# Altium PCB PCB1.PcbDoc
Units mm, origin at the board's own origin, x right, y up, seen from the top; angles counter-clockwise.
Board outline 152.4 x 101.6 mm, 2 copper layers (Top Layer, Bottom Layer); 44 components, 66 nets, 244 pads, 0 vias.
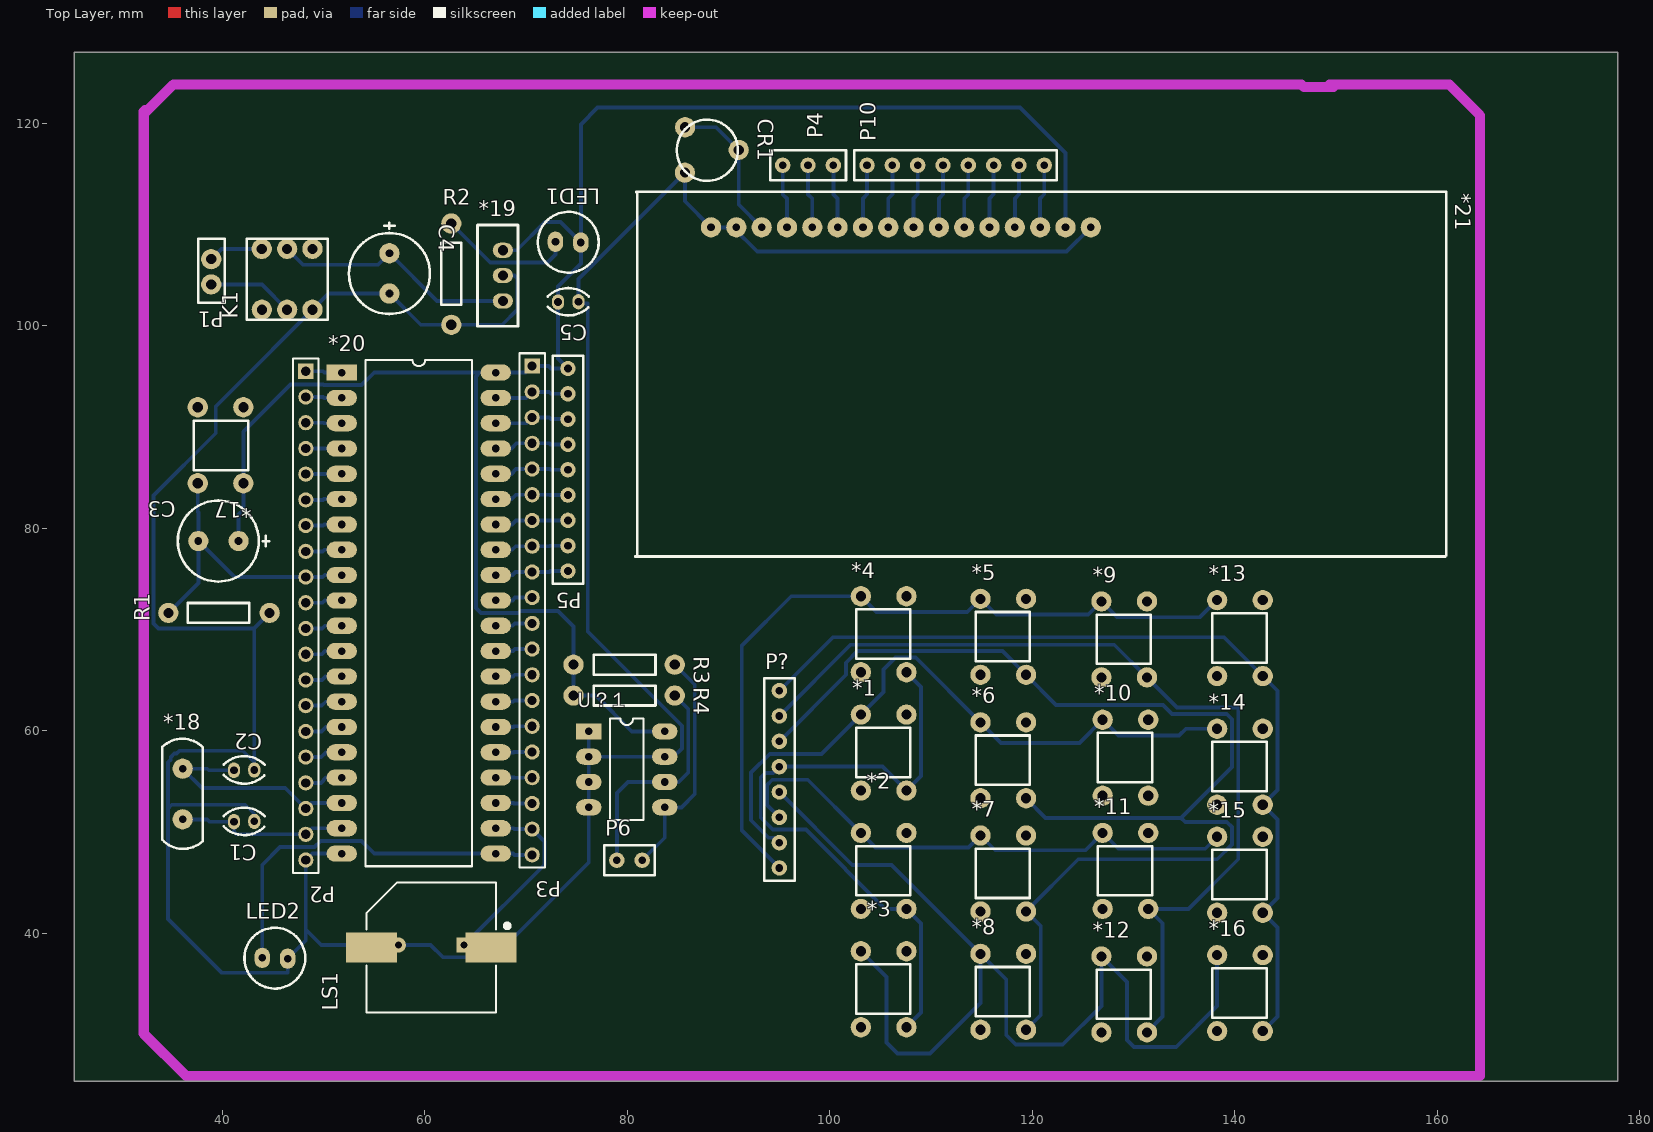
[diagram p0: Top Layer view]
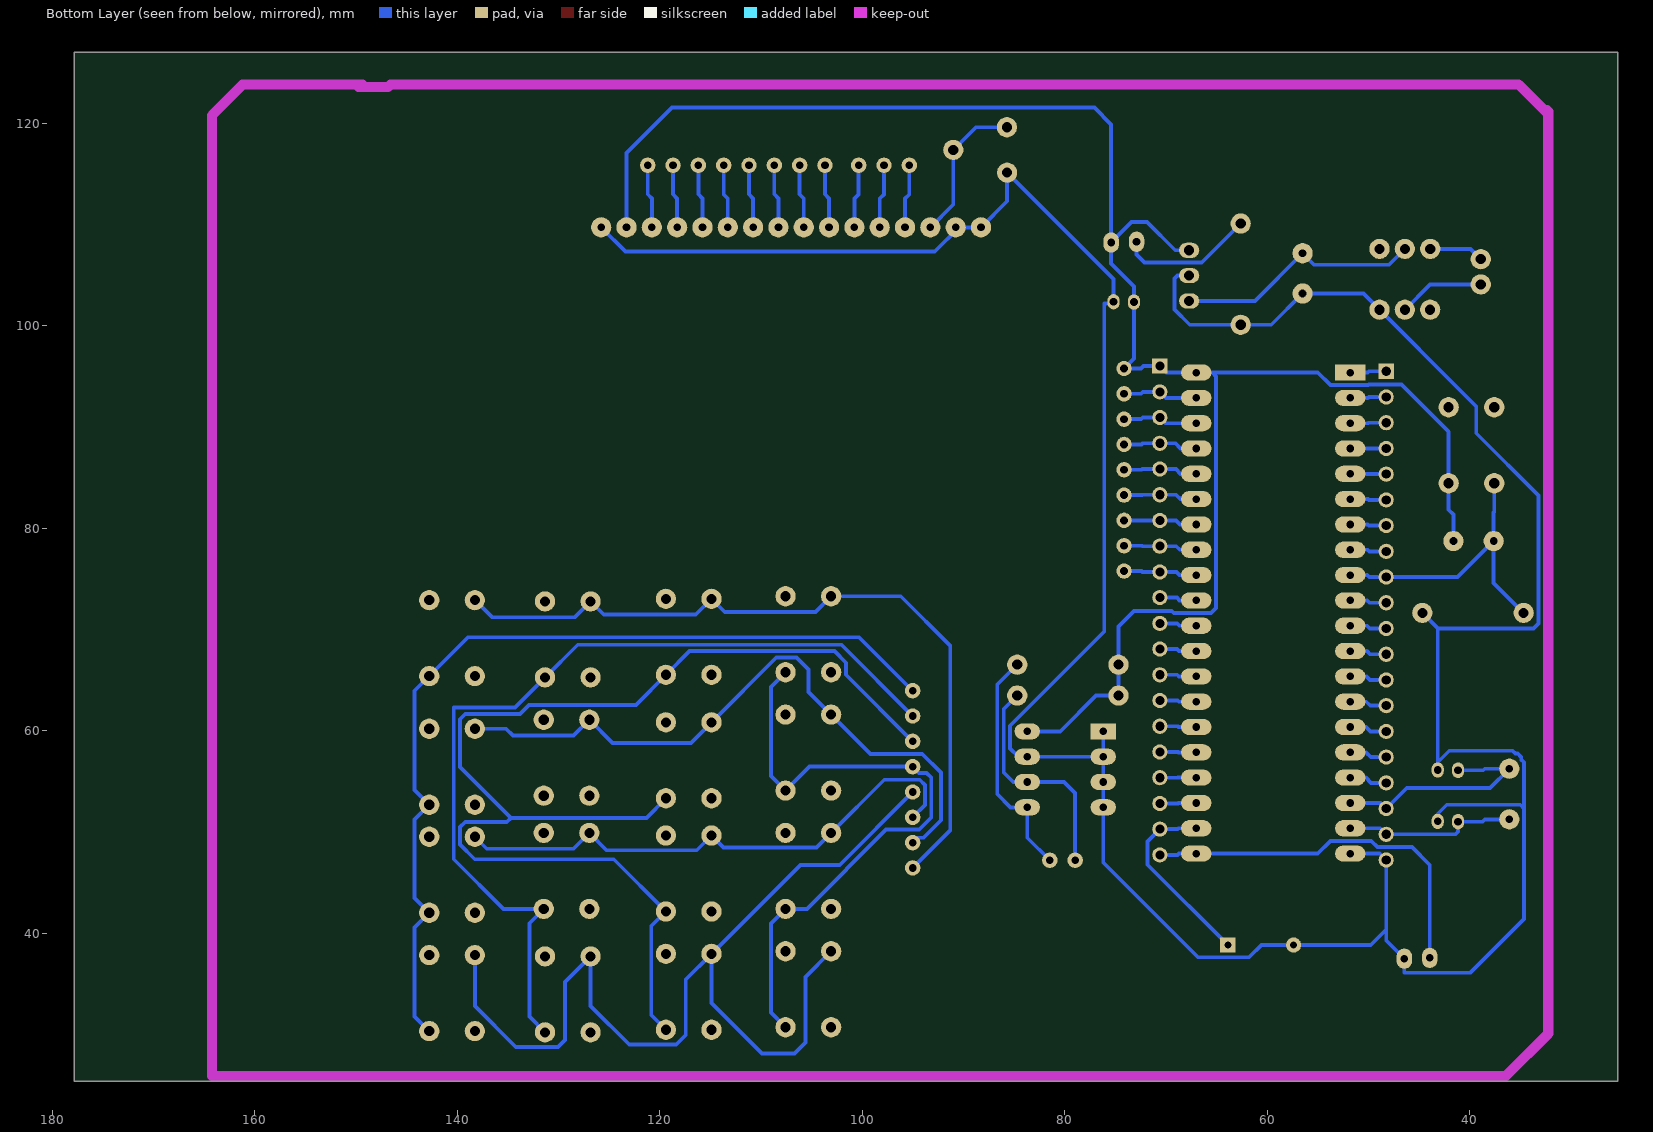
[diagram p1: Bottom Layer view, seen from below]

## Layer stack, top to bottom
Top Layer: signal copper 0.0356
Dielectric: dielectric 0.32, FR-4, Dk 4.8
Bottom Layer: signal copper 0.0356

## Board outline
25.4,25.4 177.8,25.4 177.8,127 25.4,127

## Design rules (kind name [scope] priority, off if disabled: settings)
Clearance [All] p1: gap=0.254
ComponentClearance [All] p1: gap=0.254 collisioncheckmode=3 verticalgap=0.254
PolygonConnect [All] p1: connectstyle=Relief reliefconductorwidth=0.254 reliefentries=4 polygonreliefangle="90 Angle"
RoutingLayers [All] p1: top layer_v5=FALSE bottom layer_v5=TRUE
RoutingVias [All] p1: holewidth=0.711 width=1.27 viastyle="Through Hole" minholewidth=0.711 minwidth=1.27 maxholewidth=0.711 maxwidth=1.27
SolderMaskExpansion [All] p1: expansion=0.102
TestPointUsage [All] p1: valid=0 allowmultiple=FALSE
Testpoint [All] p1: side=15 testpointundercomponent=TRUE minsize=1.016 maxsize=2.54 preferedsize=1.524 minholesize=0 maxholesize=1.016 preferedholesize=0.813 testpointgrid=0.025 style=1023 order=0-112345678
Width [All] p1: maxlimit=0.5 minlimit=0.254 preferedwidth=0.38
17 further rules are at their usual default settings.

## Components (designator, comment, footprint, x,y, rotation, side; value= is the part's Value field where it differs from the comment)
*1 "按键键盘" 按键键盘 107.569,54.102 r90 top
*2 "按键键盘" 按键键盘 107.569,42.418 r90 top
*3 "按键键盘" 按键键盘 107.569,30.734 r90 top
*4 "按键键盘" 按键键盘 107.569,65.786 r90 top
*5 "按键键盘" 按键键盘 119.38,65.532 r90 top
*6 "按键键盘" 按键键盘 119.38,53.34 r90 top
*7 "按键键盘" 按键键盘 119.38,42.164 r90 top
*8 "按键键盘" 按键键盘 119.38,30.48 r90 top
*9 "按键键盘" 按键键盘 131.318,65.278 r90 top
*10 "按键键盘" 按键键盘 131.445,53.594 r90 top
*11 "按键键盘" 按键键盘 131.445,42.418 r90 top
*12 "按键键盘" 按键键盘 131.318,30.226 r90 top
*13 "按键键盘" 按键键盘 142.748,65.405 r90 top
*14 "按键键盘" 按键键盘 142.748,52.705 r90 top
*15 "按键键盘" 按键键盘 142.748,42.037 r90 top
*16 "按键键盘" 按键键盘 142.748,30.353 r90 top
*17 "按键键盘" 按键键盘 37.592,91.948 r270 top
*18 "Y1" 晶振 38.1,48.26 r90 top
*19 "LM7805" L7xxxCV 69.215,99.949 r90 top
*20 "MCU-40P" MCU-DIP40 51.816,95.377 r0 top
*21 "LCD1602" LCD1602 80.772,77.216 r0 top
C1 "瓷片电容" 瓷片电容 42.164,51.308 r180 top
C2 "瓷片电容" 瓷片电容 42.164,56.388 r180 top
C3 "电解电容" C8mm 39.624,78.74 r180 top
C4 "电解电容" C8mm 56.515,105.156 r270 top
C5 "瓷片电容" 瓷片电容 74.168,102.616 r180 top
CR1 "可调电阻" 可调电阻 87.884,117.348 r270 top
K1 "自锁开关" 自锁开关 50.419,100.584 r90 top
LED1 "LED" LED 74.168,108.204 r180 top
LED2 "LED" LED 45.212,37.592 r0 top
LS1 "Buzzer" ABSM-1574 66.548,38.608 r180 top
P1 "hd2" 排针x2 37.719,108.077 r270 top
P2 "Header 20" HDR1X20 48.26,95.504 r270 top
P3 "Header 20" HDR1X20 70.612,96.012 r270 top
P4 "Header 3" HD3X1 101.6,117.348 r180 top
P5 "Header 9" HD9X1 72.644,97.028 r270 top
P6 "Header 2" HD2X1 77.724,45.72 r0 top
P10 "Header 8" HD8X1 122.428,117.348 r180 top
P? "Header 8" HD8X1 96.52,45.212 r90 top
R1 "RES" res 43.688,72.644 r180 top
R2 "RES" res 63.627,101.092 r90 top
R3 "RES" res 75.692,65.532 r0 top
R4 "RES" res 75.692,62.484 r0 top
U？1 "at24c02" DIP8 76.2,59.944 r0 top

## Footprints (in the part's own frame and the unit in brackets; to place one, negate y for a bottom-side part, rotate by r counter-clockwise, add the part's x,y. Pads: shape width x height; smd on the part's side, far side on the other; paste and mask are expansions set on the pad)
ABSM-1574 [mm] "Magnetic Transducer Buzzer"
  rect 5x3 smd: 1(0,0) 2(11.8,0)
  rect 1.5x1.5 hole 0.7: 1A(2.65,-0.24)
  round 1.5 hole 0.7: 2A(9.15,-0.24)
  silkscreen extent -1.83,-6.4 12.3,6.4
C8mm [mm]
  round 2 hole 0.762: 1(-2,0) 2(1.975,0)
  silkscreen extent -5,-4 4,4
DIP8 [mm]
  rect 2.5x1.6 hole 0.75: 1(0,0)
  oval 2.5x1.6 hole 0.75: 2(0,-2.5) 3(0,-5) 4(0,-7.5) 5(7.5,-7.5) 6(7.5,-5) 7(7.5,-2.5) 8(7.5,0)
  silkscreen extent 2.08,-8.75 5.42,1.25
HD2X1 [mil] "HD2"
  round 60 hole 30: 1(49.21,59.06) 2(147.64,59.06)
  silkscreen extent 0,0 197,118
HD3X1 [mil] "HD3X1"
  round 60 hole 30: 1(49.21,59.06) 2(147.64,59.06) 3(246.06,59.06)
  silkscreen extent 0,0 295,118
HD8X1 [mil] "HD8X1"
  round 60 hole 30: 1(49.21,59.06) 2(147.64,59.06) 3(246.06,59.06) 4(344.49,59.06) 5(442.91,59.06) 6(541.34,59.06) 7(639.76,59.06) 8(738.19,59.06)
  silkscreen extent 0,0 787,118
HD9X1 [mil] "HD9X1"
  round 60 hole 30: 1(49.21,59.06) 2(147.64,59.06) 3(246.06,59.06) 4(344.49,59.06) 5(442.91,59.06) 6(541.34,59.06) 7(639.76,59.06) 8(738.19,59.06) 9(836.61,59.06)
  silkscreen extent 0,0 886,118
HDR1X20 [mm] "Connector; Header; 20 Position"
  rect 1.5x1.5 hole 0.9: 1(0,0)
  round 1.5 hole 0.9: 2(2.54,0) 3(5.08,0) 4(7.62,0) 5(10.16,0) 6(12.7,0) 7(15.24,0) 8(17.78,0) 9(20.32,0) 10(22.86,0) 11(25.4,0) 12(27.94,0) 13(30.48,0) 14(33.02,0) 15(35.56,0) 16(38.1,0) 17(40.64,0) 18(43.18,0) 19(45.72,0) 20(48.26,0)
  silkscreen extent -1.27,-1.27 49.53,1.27
L7xxxCV [mm] "三端稳压管"
  oval 1.5x2 hole 1: 1(2.5,1.5) 2(5,1.5) 3(7.5,1.5)
  silkscreen extent 0,0 10,4
LCD1602 [mm] "L?"
  round 2 hole 0.762: 1(7.5,32.5) 2(10,32.5) 3(12.5,32.5) 4(15,32.5) 5(17.5,32.5) 6(20,32.5) 7(22.5,32.5) 8(25,32.5) 9(27.5,32.5) 10(30,32.5) 11(32.5,32.5) 12(35,32.5) 13(37.5,32.5) 14(40,32.5) 15(42.5,32.5) 16(45,32.5)
  silkscreen extent 0,0 80.1,36
LED [mm]
  oval 1.524x2 hole 0.762: 1(-1.25,-0.01) 2(1.26,-0.09)
  silkscreen extent -3.01,-3.04 2.99,2.96
MCU-DIP40 [mm]
  rect 3x1.6 hole 0.75: 1(0,0)
  oval 3x1.6 hole 0.75: 2(0,-2.5) 3(0,-5) 4(0,-7.5) 5(0,-10) 6(0,-12.5) 7(0,-15) 8(0,-17.5) 9(0,-20) 10(0,-22.5) 11(0,-25) 12(0,-27.5) 13(0,-30) 14(0,-32.5) 15(0,-35) 16(0,-37.5) 17(0,-40) 18(0,-42.5) 19(0,-45) 20(0,-47.5) 21(15.2,-47.5) 22(15.2,-45) 23(15.2,-42.5) 24(15.2,-40) 25(15.2,-37.5) 26(15.2,-35) 27(15.2,-32.5) 28(15.2,-30) 29(15.2,-27.5) 30(15.2,-25) 31(15.2,-22.5) 32(15.2,-20) 33(15.2,-17.5) 34(15.2,-15) 35(15.2,-12.5) 36(15.2,-10) 37(15.2,-7.5) 38(15.2,-5) 39(15.2,-2.5) 40(15.2,0)
  silkscreen extent 2.34,-48.75 12.86,1.25
res [mm]
  round 2 hole 1: 1(-1,1) 2(9,1)
  silkscreen extent 1,0.02 7.1,1.98
可调电阻 [mm]
  round 2 hole 1: 1(-2.25,-2.17) 2(-0.01,3.12) 3(2.23,-2.19)
  silkscreen extent -3,-3 3.04,3.04
按键键盘 [mm]
  round 2 hole 1: 1(0,4.5) 2(0,0) 3(7.5,0) 4(7.5,4.5)
  silkscreen extent 1.33,-0.38 6.2,4.97
排针x2 [mm]
  round 2 hole 1: 1(1.5,1.2) 2(4,1.2)
  silkscreen extent -0.5,-0.06 5.8,2.55
晶振 [mm]
  round 2 hole 0.762: 1(3,2) 2(8,2)
  silkscreen extent 0.09,0 10.96,4.02
瓷片电容 [mm]
  oval 1.2x1.5 hole 0.762: 1(-1.01,0.25)
  oval 1.2x1.524 hole 0.762: 2(1,0.28)
  silkscreen extent -2.03,-1.11 2.02,1.6
自锁开关 [mm]
  round 2 hole 1: 1(1,6.5) 2(1,4) 3(1,1.5) 4(7,1.5) 5(7,4) 6(7,6.51)
  silkscreen extent 0,0 8,8

## Part data
*2: library part Y1
*3 *19: library part L7xxxCV
*4: library part MCU-40P
LS1: "Magnetic Transducer Buzzer"
P2 P3: "Header, 20-Pin"
P4: library part "Header 9", "Header, 9-Pin"
P5: "Header, 9-Pin"
P6: "Header, 2-Pin"
P10 P?: "Header, 8-Pin"
U？1: library part DIP8

## Nets (pads, with @x,y where several pads share a name; then routed paths per layer and width w, separated by ;. In a path a pad name is that pad's centre, name@x,y a point inside that pad or via, vN(x,y) a via of type N, cw(c..) or ccw(c..) an arc to the next point about the centre after c; other vN are vias at no path point)
D0: *21.7 P10.8 | length 6.3
  Bottom Layer w0.38: *21.7 103.272,112.573 103.678,112.979 P10.8
D1: *21.8 P10.7 | length 6.3
  Bottom Layer w0.38: *21.8 105.772,112.573 106.178,112.979 P10.7
D2: *21.9 P10.6 | length 6.3
  Bottom Layer w0.38: *21.9 108.272,112.573 108.678,112.979 P10.6
D3: *21.10 P10.5 | length 6.3
  Bottom Layer w0.38: *21.10 110.772,112.573 111.178,112.979 P10.5
D4: *21.11 P10.4 | length 6.3
  Bottom Layer w0.38: *21.11 113.272,112.573 113.678,112.979 P10.4
D5: *21.12 P10.3 | length 6.3
  Bottom Layer w0.38: *21.12 115.772,112.573 116.178,112.979 P10.3
D6: *21.13 P10.2 | length 6.3
  Bottom Layer w0.38: *21.13 118.272,112.573 118.678,112.979 P10.2
D7: *21.14 P10.1 | length 6.3
  Bottom Layer w0.38: *21.14 120.772,112.573 121.178,112.979 P10.1
E: *21.6 P4.1 | length 6.3
  Bottom Layer w0.38: P4.1 100.35,112.969 100.772,112.547 *21.6
GND: *19.2 *20.20 *21.1 *21.2 *21.16 C1.1 C2.1 C4.2 C5.1 CR1.3 K1.3 LED2.2 LS1.2 LS1.2A P2.20 R1.1 R2.1 U？1.1 U？1.2 U？1.3 U？1.4 U？1.7 | length 323.2
  Bottom Layer w0.38: 34.646,52.324 35.027,52.705 42.285,52.705 43.174,51.816 C1.1 ; C2.1 43.174,70.13 ; 43.174,56.896 42.031,58.039 35.789,58.039 35.503,57.753 35.274,57.753 34.931,57.41 34.931,57.182 34.646,56.896 34.646,41.402 39.929,36.119 46.472,36.119 LED2.2 48.26,39.29 P2.20 48.893,47.877 *20.20 ; R1.1 43.148,70.104 33.731,70.104 33.223,70.612 33.223,83.236 39.37,89.383 39.37,92.035 50.516,103.181 C4.2 59.604,100.092 67.656,100.092 69.164,101.6 69.164,104.648 68.863,104.949 *19.2 ; 48.26,40.372 49.784,38.848 LS1.2A 57.398,38.862 60.579,38.862 61.798,37.643 66.853,37.643 76.2,46.99 U？1.1 ; U？1.2 84.582,57.444 85.394,58.256 85.394,60.504 76.098,69.799 76.098,102.21 75.178,102.21 75.178,104.602 CR1.3 85.694,112.294 *21.1 90.436,109.716 92.837,107.315 123.371,107.315 *21.16
Net*19_1: *19.1 C4.1 K1.5 | length 24.4
  Bottom Layer w0.38: K1.5 47.983,106.02 55.379,106.02 C4.1 61.222,102.449 *19.1
Net*20_1: *20.1 P2.1 | length 3.6
  Bottom Layer w0.38: P2.1 49.962,95.504 50.089,95.377 *20.1
Net*20_2: *20.2 P2.2 | length 3.6
  Bottom Layer w0.38: P2.2 49.987,92.964 50.074,92.877 *20.2
Net*20_3: *20.3 P2.3 | length 3.6
  Bottom Layer w0.38: P2.3 50.013,90.424 50.06,90.377 *20.3
Net*20_4: *20.4 P2.4 | length 3.6
  Bottom Layer w0.38: P2.4 50.013,87.884 50.02,87.877 *20.4
Net*20_5: *20.5 P2.5 | length 3.6
  Bottom Layer w0.38: P2.5 50.013,85.344 50.046,85.377 *20.5
Net*20_6: *20.6 P2.6 | length 3.6
  Bottom Layer w0.38: P2.6 49.987,82.804 50.06,82.877 *20.6
Net*20_7: *20.7 P2.7 | length 3.6
  Bottom Layer w0.38: P2.7 49.962,80.264 50.075,80.377 *20.7
Net*20_8: *20.8 P2.8 | length 3.6
  Bottom Layer w0.38: P2.8 49.936,77.724 50.089,77.877 *20.8
Net*20_10: *20.10 P2.10 | length 3.7
  Bottom Layer w0.38: P2.10 49.911,72.644 50.144,72.877 *20.10
Net*20_11: *20.11 P2.11 | length 3.7
  Bottom Layer w0.38: P2.11 49.886,70.104 50.159,70.377 *20.11
Net*20_12: *20.12 P2.12 | length 3.7
  Bottom Layer w0.38: P2.12 49.86,67.564 50.173,67.877 *20.12
Net*20_13: *20.13 P2.13 | length 3.7
  Bottom Layer w0.38: P2.13 49.86,65.024 50.213,65.377 *20.13
Net*20_14: *20.14 P2.14 | length 3.7
  Bottom Layer w0.38: P2.14 49.835,62.484 50.228,62.877 *20.14
Net*20_15: *20.15 P2.15 | length 3.7
  Bottom Layer w0.38: P2.15 49.809,59.944 50.242,60.377 *20.15
Net*20_16: *20.16 P2.16 | length 3.8
  Bottom Layer w0.38: P2.16 49.784,57.404 50.257,57.877 *20.16
Net*20_29: *20.29 P3.12 | length 3.7
  Bottom Layer w0.38: *20.29 68.707,67.877 68.902,68.072 P3.12
Net*20_30: *20.30 P3.11 | length 3.7
  Bottom Layer w0.38: *20.30 68.682,70.377 68.917,70.612 P3.11
Net*20_31: *20.31 P3.10 | length 3.7
  Bottom Layer w0.38: *20.31 68.656,72.877 68.931,73.152 P3.10
Net*21_3: *21.3 CR1.1 CR1.2 | length 14.8
  Bottom Layer w0.38: CR1.1 88.764,119.598 CR1.2 91.004,111.984 *21.3
NetK1_2: K1.2 P1.2 | length 8.5
  Bottom Layer w0.38: P1.2 43.926,104.077 K1.2
NetK1_6: K1.6 P1.1 | length 5.4
  Bottom Layer w0.38: P1.1 39.926,107.584 K1.6
NetLED1_2: LED1.2 R2.2 | length 13.5
  Bottom Layer w0.38: R2.2 66.471,106.248 72.136,106.248 72.908,107.02 LED1.2
NetP6_1: P6.1 R4.2 U？1.6 | length 22.7
  Bottom Layer w0.38: P6.1 78.974,53.848 80.07,54.944 U？1.6 85.09,54.944 86.028,55.882 86.028,62.148 R4.2
NetP6_2: P6.2 R3.2 U？1.5 | length 23.2
  Bottom Layer w0.38: P6.2 83.7,49.446 U？1.5 85.344,52.444 86.662,53.762 86.662,64.562 R3.2
P00: *20.39 P3.2 P5.2 | length 7.5
  Bottom Layer w0.38: *20.39 70.017,92.877 P3.2 72.263,93.472 72.457,93.278 P5.2
P01: *20.38 P3.3 P5.3 | length 7.4
  Bottom Layer w0.38: *20.38 70.057,90.377 P3.3 72.288,90.932 72.442,90.778 P5.3
P02: *20.37 P3.4 P5.4 | length 7.4
  Bottom Layer w0.38: *20.37 68.555,87.877 69.07,88.392 P3.4 72.314,88.392 72.428,88.278 P5.4
P03: *20.36 P3.5 P5.5 | length 7.4
  Bottom Layer w0.38: *20.36 68.555,85.377 69.03,85.852 P3.5 72.339,85.852 72.413,85.778 P5.5
P04: *20.35 P3.6 P5.6 | length 7.3
  Bottom Layer w0.38: *20.35 68.58,82.877 69.015,83.312 P3.6 72.339,83.312 72.373,83.278 P5.6
P05: *20.34 P3.7 P5.7 | length 7.3
  Bottom Layer w0.38: *20.34 68.605,80.377 69,80.772 P3.7 72.365,80.772 72.371,80.778 P5.7
P06: *20.33 P3.8 P5.8 | length 7.3
  Bottom Layer w0.38: *20.33 68.631,77.877 68.986,78.232 P3.8 72.339,78.232 72.385,78.278 P5.8
P07: *20.32 P3.9 P5.9 | length 7.3
  Bottom Layer w0.38: *20.32 68.656,75.377 68.971,75.692 P3.9 72.314,75.692 72.4,75.778 P5.9
P10: *13.2 *14.2 *15.2 *16.2 P?.8 | length 90.2
  Bottom Layer w0.38: P?.8 100.298,69.24 138.913,69.24 *13.2 144.196,63.957 144.196,54.153 *14.2 144.196,51.257 144.196,43.485 *15.2 144.196,40.589 144.196,31.801 *16.2
P11: *9.2 *11.2 *12.2 P?.7 | length 90.1
  Bottom Layer w0.38: P?.7 102.06,68.502 128.094,68.502 *9.2 134.29,62.306 140.312,62.306 140.335,62.283 140.335,47.32 135.433,42.418 *11.2 132.867,40.996 132.867,31.775 *12.2
P12: *5.2 *6.2 *7.2 *8.2 P?.6 | length 122.8
  Bottom Layer w0.38: P?.6 101.6,65.542 101.6,66.726 102.742,67.868 117.044,67.868 *5.2 122.352,62.56 132.893,62.56 133.804,61.649 139.192,61.649 139.7,61.141 139.7,56.413 134.696,51.41 ; *8.2 120.828,31.928 120.828,40.716 *7.2 124.536,47.32 138.252,47.32 139.7,48.768 139.7,50.495 139.192,51.003 135.103,51.003 134.696,51.41 ; *6.2 121.31,51.41 134.696,51.41
P13: *1.2 *2.2 *3.2 *4.2 P?.5 | length 63.6
  Bottom Layer w0.38: *3.2 109.017,32.182 109.017,40.97 *2.2 105.461,42.418 97.638,50.241 94.373,50.241 93.18,51.434 93.18,55.378 93.648,55.846 94.404,55.846 P?.5 105.209,56.462 *1.2 109.017,55.55 109.017,64.338 *4.2
P14: *3.4 *8.4 *12.4 *16.4 P?.4 | length 103.7
  Bottom Layer w0.38: P?.4 102.221,46.761 106.099,46.761 *8.4 ; *3.4 105.613,35.69 105.613,29.21 106.68,28.143 109.906,28.143 114.88,33.117 *8.4 ; *16.4 138.248,32.817 134.209,28.778 130.048,28.778 129.362,29.464 129.362,35.182 *12.4 126.818,32.842 123.008,29.032 118.364,29.032 117.424,29.972 117.424,35.436 *8.4
P15: *2.4 *7.4 *11.4 *15.4 P?.3 | length 54.1
  Bottom Layer w0.38: P?.3 93.814,52.668 93.814,54.661 94.322,55.169 97.818,55.169 *2.4 104.524,48.463 113.679,48.463 *7.4 116.335,48.209 125.236,48.209 *11.4 128.501,48.362 137.073,48.362 *15.4
P16: *1.4 *6.4 *10.4 *14.4 P?.2 | length 65.8
  Bottom Layer w0.38: P?.2 94.546,49.436 93.967,49.436 92.236,51.166 92.236,55.88 94.065,57.709 99.176,57.709 *1.4 105.308,63.841 105.308,66.04 106.502,67.234 108.486,67.234 *6.4 116.919,58.801 124.652,58.801 *10.4 128.501,59.538 134.493,59.538 135.16,60.205 *14.4
P17: *4.4 *5.4 *9.4 *13.4 P?.1 | length 76.1
  Bottom Layer w0.38: P?.1 91.313,50.169 91.313,68.409 96.19,73.286 *4.4 104.625,71.73 113.578,71.73 *5.4 116.436,71.476 125.516,71.476 *9.4 128.374,71.222 136.565,71.222 *13.4
P20: *20.21 LED2.1 P3.20 | length 37.4
  Bottom Layer w0.38: LED2.1 43.962,46.756 45.72,48.514 49.124,48.514 49.733,49.124 53.772,49.124 55.018,47.877 *20.21 68.732,47.877 68.857,47.752 P3.20
P21: *20.22 LS1.1 LS1.1A P3.19 | length 18.9
  Bottom Layer w0.38: LS1.1A 71.831,46.781 71.831,49.073 P3.19 68.843,50.292 68.758,50.377 *20.22
P22: *20.23 P3.18 | length 3.6
  Bottom Layer w0.38: *20.23 68.783,52.877 68.828,52.832 P3.18
P23: *20.24 P3.17 | length 3.6
  Bottom Layer w0.38: *20.24 68.809,55.377 68.814,55.372 P3.17
P24: *20.25 P3.16 | length 3.6
  Bottom Layer w0.38: *20.25 68.783,57.877 68.818,57.912 P3.16
P25: *20.26 P3.15 | length 3.6
  Bottom Layer w0.38: *20.26 68.758,60.377 68.833,60.452 P3.15
P26: *20.27 P3.14 | length 3.6
  Bottom Layer w0.38: *20.27 68.732,62.877 68.847,62.992 P3.14
P27: *20.28 P3.13 | length 3.7
  Bottom Layer w0.38: *20.28 68.732,65.377 68.887,65.532 P3.13
P37: *20.17 P2.17 | length 3.8
  Bottom Layer w0.38: P2.17 49.759,54.864 50.272,55.377 *20.17
RESET: *17.3 *20.9 C3.2 P2.9 R1.2 | length 29.8
  Bottom Layer w0.38: R1.2 37.649,74.605 C3.2 ; *17.3 37.592,81.616 37.649,81.559 C3.2 ; *20.9 50.129,75.377 49.936,75.184 P2.9 41.205,75.184 C3.2
RS: *21.4 P4.3 | length 6.3
  Bottom Layer w0.38: P4.3 95.35,112.969 95.772,112.547 *21.4
RW: *21.5 P4.2 | length 6.3
  Bottom Layer w0.38: P4.2 97.85,112.969 98.272,112.547 *21.5
VCC: *17.4 *19.3 *20.40 *21.15 C3.1 C5.2 LED1.1 P3.1 P5.1 R3.1 R4.1 U？1.8 | length 190
  Bottom Layer w0.38: C3.1 41.624,81.356 42.092,81.824 42.092,89.539 46.736,94.183 49.987,94.183 50.038,94.132 53.772,94.132 55.016,95.377 69.977,95.377 P3.1 72.238,96.012 72.472,95.778 P5.1 73.168,96.754 73.168,103.886 75.418,106.136 75.418,119.888 77.069,121.539 118.796,121.539 123.272,117.063 *21.15 ; 65.43,95.377 65.049,94.996 65.049,72.136 65.557,71.628 69.24,71.628 69.444,71.831 73.152,71.831 74.692,70.291 R4.1 76.902,63.484 80.442,59.944 U？1.8 ; *19.3 69.088,107.449 71.875,110.236 73.396,110.236 LED1.1
X1: *18.1 *20.19 C1.2 P2.19 | length 17.2
  Bottom Layer w0.38: *18.1 38.506,51.26 38.738,51.028 C1.2 41.164,50.038 41.418,49.784 P2.19 48.853,50.377 *20.19
X2: *18.2 *20.18 C2.2 P2.18 | length 22.7
  Bottom Layer w0.38: C2.2 38.684,56.108 38.532,56.26 *18.2 38.004,54.356 46.228,54.356 P2.18 48.813,52.877 *20.18
pads on no net: *1.1 *1.3 *2.1 *2.3 *3.1 *3.3 *4.1 *4.3 *5.1 *5.3 *6.1 *6.3 *7.1 *7.3 *8.1 *8.3 *9.1 *9.3 *10.1 *10.2 *10.3 *11.1 *11.3 *12.1 *12.3 *13.1 *13.3 *14.1 *14.3 *15.1 *15.3 *16.1 *16.3 *17.1 *17.2 K1.1 K1.4

## Keep-outs
Keep-Out Layer:
  lines w1: 32.258,121.158 32.258,30.099 36.449,25.908 164.211,25.908 164.211,120.777 161.163,123.825 149.352,123.825 ; 32.385,121.285 32.385,121.031 35.179,123.825 146.558,123.825 146.812,123.571 149.733,123.571